# Altium PCB 把手锁主板20429.PcbDoc (part 1 of 2)
Units mil, origin at the board's own origin, x right, y up, seen from the top; angles counter-clockwise.
Board outline 5950 x 1025 mil, 2 copper layers (Top Layer, Bottom Layer); 74 components, 56 nets, 241 pads, 365 vias.
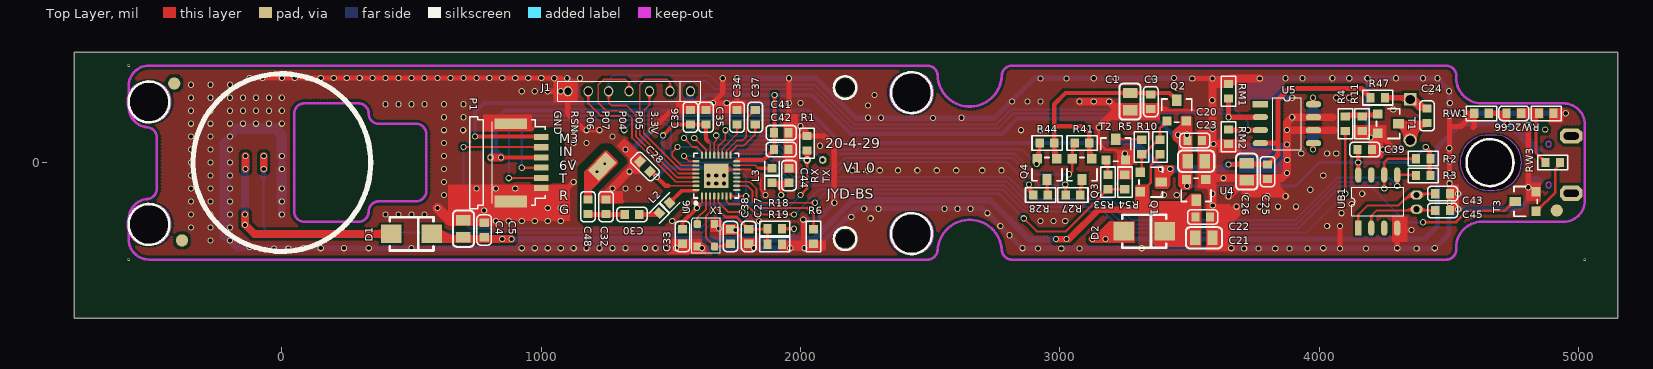
[diagram p0: Top Layer view]
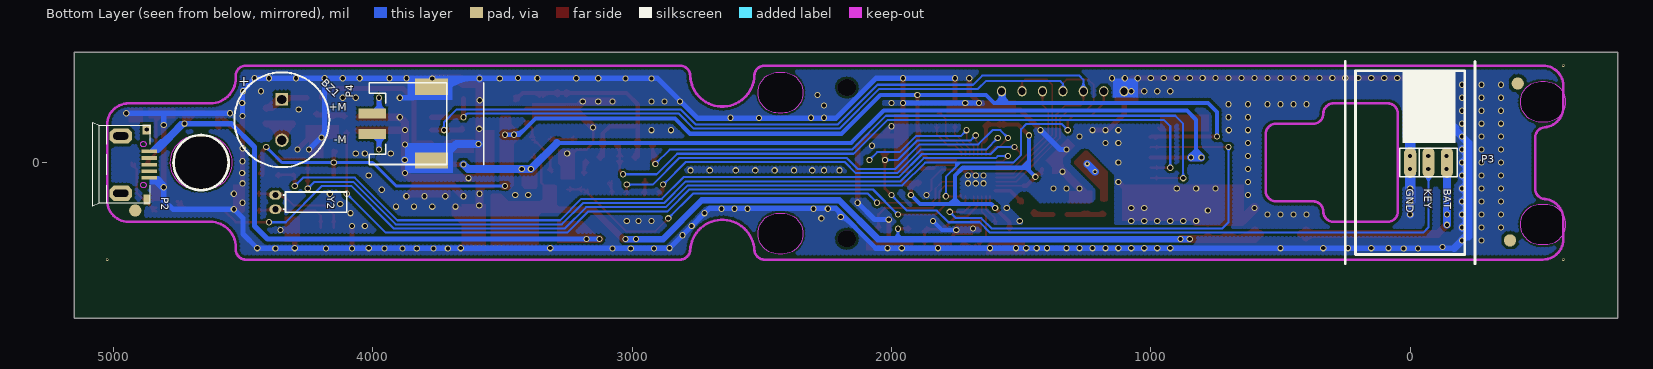
[diagram p1: Bottom Layer view, seen from below]
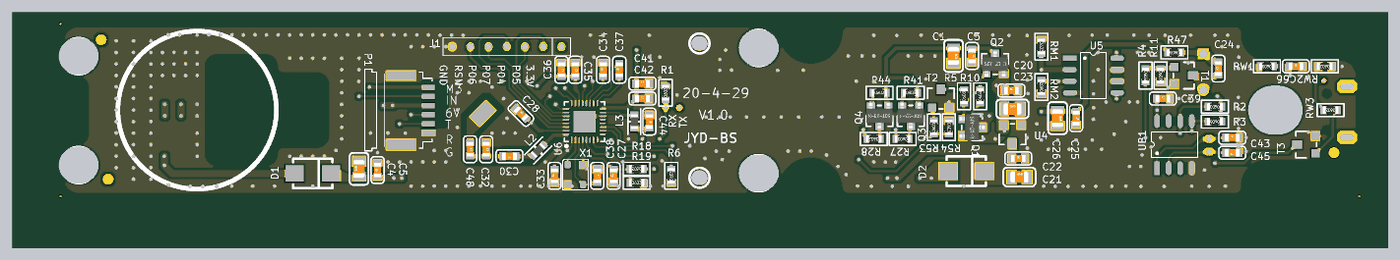
[diagram p3: 3D render of the assembled board from above, using the file's embedded part models]

## Layer stack, top to bottom
Top Layer: signal copper 1.4
Dielectric: dielectric 12.6, FR-4, Dk 4.8
Bottom Layer: signal copper 1.4

## Board outline
-800,425 5150,425 5150,-600 -800,-600
cut-out: 4673.23,106.3 4649.61,106.3 ccw(c4649.61,0) 4543.31,0 ccw(c4649.61,0) 4649.61,-106.3 4673.23,-106.3 ccw(c4673.23,0) 4779.53,0 ccw(c4673.23,0)
cut-out: -504.29,312.72 -520.04,312.72 ccw(c-520.04,233.98) -598.78,233.98 ccw(c-520.04,233.98) -520.04,155.24 -504.29,155.24 ccw(c-504.29,233.98) -425.55,233.98 ccw(c-504.29,233.98)
cut-out: -504.29,-159.72 -520.04,-159.72 ccw(c-520.04,-238.46) -598.78,-238.46 ccw(c-520.04,-238.46) -520.04,-317.2 -504.29,-317.2 ccw(c-504.29,-238.46) -425.55,-238.46 ccw(c-504.29,-238.46)
cut-out: 2435.43,-195.16 2419.69,-195.16 ccw(c2419.69,-273.9) 2340.94,-273.9 ccw(c2419.69,-273.9) 2419.69,-352.64 2435.43,-352.64 ccw(c2435.43,-273.9) 2514.17,-273.9 ccw(c2435.43,-273.9)
cut-out: 2435.43,348.15 2419.69,348.15 ccw(c2419.69,269.41) 2340.94,269.41 ccw(c2419.69,269.41) 2419.69,190.67 2435.43,190.67 ccw(c2435.43,269.41) 2514.17,269.41 ccw(c2435.43,269.41)

## Design rules (kind name [scope] priority, off if disabled: settings)
Clearance Clearance_2 [(IsWire)or(IsThruPin)or(IsFill)or(InPolygon)or(IsKeepOut) vs (IsWire)or(IsThruPin)or(IsFill)or(InPolygon)or(IsKeepOut)] p1 off: gap=10
Clearance Clearance_1 [InComponent('P2')] p2: gap=5
Clearance [All] p3: gap=7.87
ComponentClearance [All] p1: gap=0 collisioncheckmode=3 verticalgap=0 showdistances=FALSE
HoleSize [All] p1: absolutevalues=TRUE maxlimit=500 minlimit=1 maxpercent=80.000 minpercent=20.000
HoleToHoleClearance [All] p1: gap=0 allowstackedmicrovias=TRUE
MinimumSolderMaskSliver [All] p1: minsoldermaskwidth=0
PolygonConnect PolygonConnect_1 [IsVia] p1: connectstyle=Direct reliefconductorwidth=10 reliefentries=4 polygonreliefangle="90 Angle" airgapwidth=10
PolygonConnect [All] p2: connectstyle=Relief reliefconductorwidth=10 reliefentries=4 polygonreliefangle="90 Angle" airgapwidth=10
RoutingVias [All] p1: holewidth=280 width=500 viastyle="Through Hole" minholewidth=8 minwidth=10 maxholewidth=28 maxwidth=50
SilkToSilkClearance [All] p1: silktosilkclearance=0
SilkToSolderMaskClearance [IsPad] p1: minsilkscreentomaskgap=0 clearancetoexposedcopper=TRUE
SolderMaskExpansion [All] p1: expansion=4
Width [All] p1: maxlimit=80 minlimit=6 preferedwidth=7.87
22 further rules are at their usual default settings.

## Components (designator, comment, footprint, x,y, rotation, side; value= is the part's Value field where it differs from the comment)
BZ1 "BUZZER" BUZZER_D93_L40 4350,165 r270 bottom
C1 "22uF" 0805C 3270,235 r270 top
C3 "0.1uF" 0603C 3350,235 r270 top
C4 "4.7UF/24V" 0805C 700,-255 r90 top
C5 "0.1uF" 0603C 780,-260 r90 top
C20 "0.1uF" 0603C 3520,85 r0 top
C21 "22uF/10V" 0805C 3555,-290 r0 top
C22 "0.1uF" 0603C 3550,-210 r0 top
C23 "10uF/10V" 0805C 3525,5 r0 top
C24 "10uF/10V" 0603C 4415,180 r90 top
C25 "0.1uF" 0603C 3800,-35 r270 top
C26 "22uF" 0805C 3720,-35 r270 top
C27 "1nF" 0603C 1800,-285 r90 top
C28 "1uF/6.3V" 0603C 1400,-15 r315 top
C30 "1.5pF" 0603C 1350,-200 r180 top
C32 "1pF" 0603C 1250,-170 r270 top
C33 "0.1uF" 0603C 1545,-285 r90 top
C34 "0.1uF" 0603C 1755,175 r90 top
C35 "1uF" 0603C 1635,175 r270 top
C36 "0.1uF" 0603C 1575,175 r270 top
C37 "0.1uF" 0603C 1825,175 r90 top
C38 "2.7pF" 0603C 1730,-285 r270 top
C39 "0.1uF" 0603C 4175,50 r0 top
C41 "10uF/6.3V" 0603C 1925,115 r0 top
C42 "0.1uF" 0603C 1925,50 r0 top
C43 "22pF" 0603C 4475,-120 r0 top
C44 "10uF/6.3V" 0603C 1955,-50 r270 top
C45 "22pF" 0603C 4475,-185 r180 top
C48 "NC_R0" 0603C 1180,-170 r270 top
C66 "10uF/10V" 0603C 4750,190 r0 top
D1 "SS14" DO-214AA 500,-275 r180 top
D2 "SS14" DO-214AA 3325,-265 r180 top
J1 "7P" 7P-2.0MM_1 1575,275 r180 top
L2 "2nH" 0603L 1475,-175 r45 top
L3 "4.7uH" 0603L 1890,-50 r90 top
P1 "指纹串口" SH-1.0-6P 1000,0 r270 top
P2 "MICROUSB" MICRO-USB_F-B 4915.75,-7.87 r270 bottom
P3 "电池盒" 3P-1.8MM 0,0 r180 bottom
P4 "电机接口" S2B-PH-SM3-TB 3950,150 r90 bottom
Q1 "SI2301" "SOT-23 - GDS" 3350,-75 r270 top
Q2 "SI2301" "SOT-23 - GDS" 3450,200 r0 top
Q3 "BSS123W" "SOT-23 - GDS" 3085,-25 r180 top
Q4 "BSS123W" "SOT-23 - GDS" 2950,-25 r180 top
R1 "NC/100K" 0603R 2025,75 r90 top
R2 "10K" 0603R 4400,15 r180 top
R3 "10K" 0603R 4400,-50 r180 top
R4 "200R" 0603R 4100,150 r270 top
R5 "1K" 0603R 3315,60 r90 top (schematic designator R53)
R6 "10K" 0603R 2050,-285 r90 top
R10 "100K" 0603R 3385,60 r90 top
R11 "10K" 0603R 4165,150 r270 top
R18 "2M%1" 0603R 1900,-255 r180 top
R19 "500K%1" 0603R 1900,-315 r0 top
R27 "10R" 0603R 3050,-125 r180 top
R28 "10R" 0603R 2925,-125 r180 top
R41 "10K" 0603R 3085,75 r0 top
R44 "10K" 0603R 2950,75 r0 top
R47 "10R" 0603R 4225,250 r180 top
R53 "4.7K" 0603R 3185,-75 r90 top
R54 "100K" 0603R 3250,-75 r270 top
RM1 "10K" 0603R 3650,275 r270 top
RM2 "10K" 0603R 3650,100 r90 top
RW1 "100K" 0603R 4625,190 r180 top
RW2 "100K" 0603R 4875,190 r180 top
RW3 "200R" 0603R 4900,0 r180 top
T1 "SS8050" SOT-23-3L 4265,150 r270 top
T2 "PMBT3904" SOT-23-3L 3215,50 r0 top
T3 "PMBT3904" SOT-23-3L 4795,-150 r90 top
U4 "HT7533" SOT-23-3L 3525,-105 r180 top
U5 "CP2117" SOP8 3875,150 r0 top
U6 "BK3431Q" QFN32_4*4*0.4 1675,-50 r90 top
UB1 "PCF8563" SOP8 4225,-150 r90 top
X1 "16MHZ" XTAL3225 1635,-280 r270 top
Y2 "32.768KHZ" 晶振-9 4375,-125 r270 bottom

## Footprints (in the part's own frame and the unit in brackets; to place one, negate y for a bottom-side part, rotate by r counter-clockwise, add the part's x,y. Pads: shape width x height; smd on the part's side, far side on the other; paste and mask are expansions set on the pad)
3P-1.8MM [mm]
  oval 1.2x3 smd: 1(0,0) 2(1.8,0) 3(3.6,0)
  silkscreen extent -1,-1.4 4.6,1.4
7P-2.0MM_1 [mm]
  oval 0.9x1 hole 0.7 mask+0.05: 1(0,0) 2(2,0) 3(4,0) 4(6,0) 5(8,0) 6(10,0) 7(12,0)
  silkscreen extent -1,-1 13,1
0603C [mm]
  rect 0.8x0.9 smd: 1(-0.711,0) 2(0.711,0)
  silkscreen extent -1.47,-0.71 1.47,0.71, body extent -0.8,-0.4 0.8,0.4, height 0.3
0603L [mm]
  rect 0.8x0.9 smd: 1(-0.711,0) 2(0.711,0)
  silkscreen extent -1.4,-0.7 1.4,0.7, body extent -1.21,-1.21 1.21,1.21, height 0.46
0603R [mm]
  rect 0.8x0.9 smd: 1(-0.711,0) 2(0.711,0)
  silkscreen extent -1.47,-0.71 1.47,0.71, body extent -0.85,-0.4 0.85,0.4, height 0.56
0805C [mil]
  rect 40x56 smd: 1(-33,0) 2(33,0)
  silkscreen extent -70,-41 70,41, body extent -39,-25 39,25, height 30
BUZZER_D93_L40 [mm]
  rect 1.2x1.2 hole 0.9: 1(-2,0)
  round 1.3 hole 0.9: 2(2,0)
  silkscreen extent -4.65,-4.65 4.65,4.65
DO-214AA [mm]
  rect 2x1.8 smd: 1(2,0) 2(-2,0)
  silkscreen extent -2.15,-1.63 2.15,1.63
MICRO-USB_F-B [mm]
  rect 0.36x1.5 smd mask+0.05: 1(-1.3,1.4) 2(-0.65,1.4) 3(0,1.4) 4(0.65,1.4) 5(1.3,1.4)
  oct 1.5x2.2 hole 0.7 slot 1.5 at 90 deg mask+0.05: 6(2.8,-1.4) 7(-2.8,-1.4)
  rect 1x0.6 smd: 8(3.429,1.143)
  rect 1x0.8 / inner rect 1x0.8 / far side round 0.6 hole 0.4 unplated: 9(-3.429,1.143)
  Keep-Out Layer circle w0.1: c-2,0.813 r0.275
  Keep-Out Layer circle w0.1: c2,0.813 r0.275
  silkscreen extent -4.1,-4.14 4.1,1.5
QFN32_4*4*0.4 [mm]
  rect 2.4x2.4 smd paste-0.025 mask+0.051: 0(0,0)
  oval 0.7x0.2 smd paste-0.025 mask+0.051: 1(-2,1.4) 2(-2,1) 3(-2,0.6) 4(-2,0.2) 5(-2,-0.2) 6(-2,-0.6) 7(-2,-1) 8(-2,-1.4) 17(2,-1.4) 18(2,-1) 19(2,-0.6) 20(2,-0.2) 21(2,0.2) 22(2,0.6) 23(2,1) 24(2,1.4)
  oval 0.2x0.7 smd paste-0.025 mask+0.051: 9(-1.4,-2) 10(-1,-2) 11(-0.6,-2) 12(-0.2,-2) 13(0.2,-2) 14(0.6,-2) 15(1,-2) 16(1.4,-2) 25(1.4,2) 26(1,2) 27(0.6,2) 28(0.2,2) 29(-0.2,2) 30(-0.6,2) 31(-1,2) 32(-1.4,2)
  silkscreen extent -2.82,-2.2 2.2,2.2
S2B-PH-SM3-TB [mm]
  rect 1x2.7 smd mask+0.05: 1(-1,1.3) 2(1,1.3)
  rect 1.6x3.2 smd mask+0.05: A(-3.6,-4.5) B(3.6,-4.5)
  silkscreen extent -4,-9.6 4,1.6
SH-1.0-6P [mm]
  rect 0.6x1.4 smd paste+0: 1(-2.5,0) 2(-1.5,0) 3(-0.5,0) 4(0.5,0) 5(1.5,0) 6(2.5,0)
  rect 1x3.2 smd paste+0: A(-3.8,-3)
  rect 1.2x3.2 smd: B(3.8,-3)
  silkscreen extent -4.5,-7 4.5,0.4
SOP8 [mm]
  rect 1.5x0.6 smd mask+0.05: 1(-2.6,1.905)
  oval 1.5x0.6 smd mask+0.05: 2(-2.6,0.635) 3(-2.6,-0.635) 4(-2.6,-1.905) 5(2.6,-1.905) 6(2.6,-0.635) 7(2.6,0.635) 8(2.6,1.905)
  round 0.4 on Top Overlay mask+0.05: ""(-0.949,1.905)
  silkscreen extent -1.4,-2.54 1.4,2.54
"SOT-23 - GDS" [mil]
  rect 36x43.31 smd: D(0,40)
  rect 36x36 smd: G(-37.4,-40) S(37.4,-40)
  silkscreen extent -57,-45 58,45, body extent -57,-55 57,55, height 47
SOT-23-3L [mil]
  rect 36x36 smd: 1(-37.4,-40) 2(37.4,-40)
  rect 36x43.31 smd: 3(0,40)
  silkscreen extent -57,-45 58,45
XTAL3225 [mm]
  rrect50% 0.8x0.7 smd: 1(-1.1,-0.85) 3(1.1,0.85)
  rect 0.8x0.7 smd: 2(1.1,-0.85) 4(-1.1,0.85)
  silkscreen extent -1.7,-1.4 1.7,1.4
晶振-9 [mm]
  oval 0.9x1.2 hole 0.6: 1(0,0) 2(1.4,0)
  rect 0x0 smd: 3(0.635,8)
  silkscreen extent -0.3,0.76 1.7,7

## Part data
BZ1: "Buzzer"
C1 C3 C4 C5: library part "CAP NP"
C20 C22 C25 C26 C27 C66: library part CAP-NP, "Capacitor, Ceramic"
C21 C23: library part CAP-P, "Capacitor, tolerance ±20%"
C24: library part C_0_Dup1
C28 C30 C32 C33 C34 C35 C36 C37 C38 C41 C42 C44 C48: library part Cap, "Capacitor"
C39 C43 C45: library part C
D1 D2: library part D
L2 L3: "Power Inductor, 4.7uH, 0.7A, 260mR DCR"
P1: library part "Header 6", "Header, 6-Pin"
P2 P4: library part MHDR1X2, "Header, 2-Pin"
P3: library part "Header 3", "Header, 3-Pin"
Q1 Q2: library part PWRMOSFET_EP_DGS_0
Q3 Q4: library part BSS123L_0
R1 RM1 RM2: library part Pro71C3.TMP_UnNamed_1
R2 R3 R41 R44: library part RES
R4 R11 R27 R28 R47: library part R_Dup1
R5 R10 R53 R54 RW1 RW2 RW3: library part R
R6 R18 R19: library part Res2, "Resistor"
T1 T2 T3: library part NPN_BJT, "Bipolar Junction Transistor"
U4: library part XC6206P302M
U5: library part AM24LC02_0
UB1: library part IC8
Y2: library part 晶振

## Free pads (board coordinates)
  round 30 / inner round 30 / far side round 24 hole 16: 0(2085,10) 2(2025,10)
  round 10 hole 5: 1(-590.55,-374.02) 2(-590.55,374.02) 3(5023.62,-374.02)
  round 39.37 hole 90.55 slot 106.3 at 0 deg: 1(-512.17,-238.46) 2(-512.17,233.98) 5(2427.56,-273.9) 6(2427.56,269.41)
  rect 59.06x98.43 smd rot 135: 1(1235,-15)
  round 23.62 hole 62.99 slot 70.87 at 0 deg: 3(2171.65,-293.58) 4(2171.65,289.09)
  round 39.37 hole 110.24 slot 118.11 at 0 deg: 7(4661.42,0)
  round 47.24 all layers, no hole: MARK(-415,305) MARK(-385,-300) MARK(4915,-185)

## Via types
v1: diameter 24, hole 16, Top Layer to Bottom Layer, tented both sides, 363 vias
v2: diameter 20, hole 10, Top Layer to Bottom Layer, tented both sides, 2 vias

## Nets (pads, with @x,y where several pads share a name; then routed paths per layer and width w, separated by ;. In a path a pad name is that pad's centre, name@x,y a point inside that pad or via, vN(x,y) a via of type N, cw(c..) or ccw(c..) an arc to the next point about the centre after c; other vN are vias at no path point)
ANT: C48.1 pad.1@1235,-15 | length 240.2
  Top Layer w20: C48.1@1180,-142 1180,-70 v2(1215,-35) pad.1@1216.59,-33.41 ; pad.1@1201.55,-28.92 cw(c1154.41,-28.92) 1187.74,-62.26 cw(c1221.08,-95.59) pad.1@1221.08,-48.45
  Bottom Layer w30: v2(1215,-35) v2(1245,-5)
BAT_ADC: C27.2 R18.2 R19.1 U6.4 | length 735.7
  Top Layer w6: R19.1@1862.99,-304.02 ccw(c1846.05,-287.08) 1870,-287.08 ; R18.2@1862.99,-265.98 cw(c1846.05,-282.92) 1870,-282.92 ; 1870,-292.57 cw(c1907.6,-292.57) R18.2@1881.01,-265.98 ; 1870,-291.91 ccw(c1893.12,-291.91) R19.1@1876.77,-308.26 ; 1870,-278.09 cw(c1893.12,-278.09) R18.2@1876.77,-261.74 ; 1870,-277.43 ccw(c1907.6,-277.43) R19.1@1881.01,-304.02 ; R19.1@1872,-315 1870,-313 1870,-257 R18.2@1872,-255
  Top Layer w7: U6.4@1667.13,-128.74 1667.13,-167 1675.13,-175
  Top Layer w10: 1675.13,-175 1710.13,-210 1753,-210 C27.2@1800,-257 1870,-257 1872,-259 R19.1@1872,-315 ; 1778.29,-235.29 cw(c1756.58,-257) C27.2@1787.28,-257 ; 1783.04,-240.04 ccw(c1798.03,-225.06) C27.2@1798.03,-246.25 ; C27.2@1809.57,-264.6 cw(c1827.92,-282.95) 1827.92,-257 cw(c1827.92,-231.05) C27.2@1809.57,-249.4 ; 1845.98,-257 ccw(c1845.98,-230.94) R18.2@1864.4,-249.37 ; 1846.13,-257 cw(c1846.13,-282.84) 1864.4,-264.57 cw(c1846.05,-282.92) 1872,-282.92 cw(c1897.95,-282.92) R18.2@1879.6,-264.57 ; R19.1@1864.4,-305.43 ccw(c1846.05,-287.08) 1872,-287.08 ccw(c1897.95,-287.08) R19.1@1879.6,-305.43
BEEP: R4.2 U6.7 | length 2998.2
  Top Layer w7: U6.7@1714.37,-128.74 1714.37,-149.37 1725,-160
  Top Layer w8: 1725,-160 1790,-160 1830,-200 v1(1975,-200) ; v1@1969.34,-205.66 ccw(c1955.69,-219.31) 1955.69,-200 ccw(c1955.69,-180.69) v1@1969.34,-194.34
  Top Layer w10: R4.2@4092.4,114.4 cw(c4074.05,96.05) 4100,96.05 cw(c4125.95,96.05) R4.2@4107.6,114.4 ; v1@4095.05,-115.05 ccw(c4083.1,-103.1) 4100,-103.1 ccw(c4116.9,-103.1) v1@4104.95,-115.05 ; v1(4100,-120) R4.2@4100,122
  Bottom Layer w8: v1(1975,-200) 2071,-104 2779,-104 2862.87,-187.87 3167.87,-187.87 3250,-270 3950,-270 v1(4100,-120) ; v1@1975,-192 ccw(c1975,-172.69) 1988.66,-186.34 ccw(c2002.31,-200) v1@1983,-200 ; v1@4092,-120 cw(c4072.69,-120) 4086.34,-133.66 cw(c4100,-147.31) v1@4100,-128
GND: C1.2 C3.2 C4.2 C5.2 C20.2 C21.2 C22.2 C23.2 C25.2 C26.2 C27.1 C28.1 C32.1 C33.1 C34.2 C35.1 C36.1 C38.1 C39.2 C41.2 C42.2 C43.2 C44.1 C45.1 J1.7 P1.6 P1.A P1.B P2.5 P3.1 P4.A P4.B R1.2 R6.1 R11.2 R19.2 R54.1 RM1.1 RM2.1 RW1.2 RW2.1 T1.2 T2.2 T3.2 U4.1 U5.6 U5.7 U6.0 U6.14 UB1.4 X1.2 X1.4 | length 26100.6
  Top Layer w7: v1(1675,-50) 1698.62,-26.38 U6.14@1753.74,-26.38 1806.38,-26.38 1845,-65 1845,-105 v1(1865,-125) ; U6.0@1675,-41.5 ccw(c1675,-20.98) 1689.51,-35.49 ccw(c1704.02,-50) U6.0@1683.5,-50 ; v1@1856.5,-125 ccw(c1835.98,-125) 1850.49,-110.49 ccw(c1865,-95.98) v1@1865,-116.5
  Top Layer w10: C38.1@1731.97,-267.75 cw(c1731.97,-305.84) 1758.91,-278.91 ; C38.1@1737,-257 C27.1@1793,-313 ; C38.1@1742.72,-257 ccw(c1756.52,-257) C38.1@1746.76,-266.76 ; C38.1@1747,-260 ccw(c1763.9,-260) 1751.95,-271.95 ; v1@1757,-260 ccw(c1798.04,-260) 1769.02,-289.02 ; 1771.09,-291.09 ccw(c1798.03,-264.16) C27.1@1798.03,-302.25 ; C27.1@1783.24,-303.24 cw(c1773.48,-313) C27.1@1787.28,-313 ; v1@3145.05,130.05 cw(c3133.1,118.1) 3150,118.1 cw(c3166.9,118.1) v1@3154.95,130.05 ; v1(3150,135) 3150,75 3175,50 3212.4,50 3250,12.4 T2.2@3252.4,10 ; T2.2@3239.4,10 ccw(c3208.02,10) 3230.21,32.19 ccw(c3252.4,54.38) T2.2@3252.4,23 ; v1@3245.05,30.05 cw(c3233.1,18.1) 3250,18.1 cw(c3266.9,18.1) v1@3254.95,30.05 ; C3.2@3350,202 C3.2@3350,207 ; 3402.33,202 3588,202
  Top Layer w12: v1@2810,235 v1(2815,235)
  Top Layer w16: v1@2010,-330 v1(2010,-220) ; 2010,-308.27 ccw(c2036.73,-308.27) v1@2017.83,-327.17
  Top Layer w20: v1(-125,326.18) 1073.82,326.18 1102.56,297.44 J1.7@1102.56,275 ; v1(750,-100) v1(825,-100) v1(900,-100) 1100,-100 v1(1125,-75) ; v1(1025,275) v1(1075,275) J1.7@1102.56,275 ; 1074.91,325.09 cw(c1026.79,276.97) J1.7@1094.84,276.97 ; J1.7@1097.1,267.58 cw(c1083.93,254.4) 1102.56,254.4 cw(c1121.19,254.4) J1.7@1108.02,267.58 ; J1.7@1097.1,282.42 ccw(c1083.93,295.6) 1102.56,295.6 ccw(c1121.19,295.6) J1.7@1108.02,282.42 ; 1154.51,135.49 ccw(c1175,155.97) v1@1175,127 ; v1@1229.6,125 1165,125 1102.56,187.44 J1.7@1102.56,275 ; C32.1@1250,-142 1250,-125.4 C28.1@1380.2,4.8 ; C32.1@1257.72,-142 cw(c1316.42,-142) v1@1274.91,-100.49 ; v1(1425,125) 1503,203 C36.1@1575,203 C35.1@1635,203 ; v1(1480,-330) v1(1520,-330) ; v1@1488.11,-330 ccw(c1488.11,-258.08) C33.1@1538.97,-308.94 ; v1@1522.92,-327.08 cw(c1543.03,-347.19) C33.1@1543.03,-318.75 ; C33.1@1537.28,-312.93 cw(c1520,-312.72) v1(1520,-330) ; 1572.28,-313 cw(c1572.28,-350.59) X1.2@1598.86,-324.01 ; X1.2@1597.12,-318.89 ccw(c1619.14,-296.86) v1@1619.95,-328 ; X1.2@1604.41,-322.82 ccw(c1620,-309.48) v1(1620,-330) 1608.23,-330 X1.2@1601.54,-323.31 1591.23,-313 C33.1@1545,-313 1537,-313 v1(1520,-330) ; C35.1@1642.72,203 cw(c1661.35,203) C35.1@1648.17,216.17 ; X1.4@1668.46,-236.69 1688.77,-257 C38.1@1730,-257 C38.1@1737,-257 ; X1.4@1671.14,-235.99 ccw(c1721.86,-185.26) C38.1@1721.86,-257 ; v1@1686.41,-252.59 ccw(c1697.07,-241.93) 1697.07,-257 ; v1(1700,325) 1700,268 C35.1@1635,203 ; v1(1755,325) C34.2@1755,203 C35.1@1635,203 ; C27.1@1793,-313 C27.1@1800,-313 1803,-313 v1(1820,-330) ; R19.2@1928,-315 1943,-330 v1(1960,-330) ; R19.2@1933.02,-314.17 ccw(c1960,-299.1) v1(1960,-330) ; R19.2@1936.5,-323.5 ccw(c1951.39,-308.61) v1@1959.25,-328.14 ; C42.2@1948.94,43.97 cw(c1934.29,29.33) 1955,29.33 ; C42.2@1948.94,56.03 ccw(c1934.29,70.67) 1955,70.67 ; C41.2@1948.94,108.97 cw(c1934.29,94.33) 1955,94.33 ; C41.2@1948.94,121.03 ccw(c1934.29,135.67) 1955,135.67 ; C41.2@1953,115 C41.2@1955,117 ; C41.2@1953,122.72 ccw(c1953,141.35) C41.2@1966.17,128.17 ; C44.1@1955,-22 C41.2@1955,103 ; v1(1955,325) v1(1955,230) C41.2@1955,117 ; C41.2@1957.06,117.1 ccw(c1991.1,151.13) 1991.1,103 ; C41.2@1959.03,121.03 cw(c2000,80.06) v1@2000,138 ; C41.2@1967,129 cw(c1991.29,104.72) v1@1999.52,138.06 ; v1@2003.34,136.66 cw(c1969.68,103) R1.2@2017.28,103 ; v1@2015,-328 ccw(c2015,-279.72) R6.1@2049.14,-313.86 ; R6.1@2036.83,-326.17 ccw(c2023.65,-313) R6.1@2042.28,-313 ; R6.1@2042.66,-310.95 cw(c2015,-300.39) v1(2015,-330) ; R6.1@2050,-313 2033,-330 v1(2015,-330) ; v1(2130,-155) 2130,65 2092,103 R1.2@2025,103 ; v1@2619,172 v1(2620,173) ; R54.1@3250,-47 3250,12.4 v1(3250,35) ccw(c3277.24,35) T2.2@3258.04,15.68 ; 3250,-15.11 cw(c3277.51,-15.11) T2.2@3258.06,4.34 ; C1.2@3270,202 3275,207 C3.2@3350,207 3407.33,207 ; C1.2@3285.07,194.93 cw(c3314.21,165.79) 3314.21,207 ; v1(3510,324) v1(3588,324) ; 3632.89,324 cw(c3632.89,289.38) RM1.1@3658.63,312.53 ; RM1.1@3636.83,316.17 cw(c3623.65,303) RM1.1@3642.28,303 ; RM1.1@3643.76,299.16 ccw(c3588,249.01) v1(3588,324) ; RM1.1@3650,303 3646.14,306.86 3629,324 v1(3588,324) ; C25.2@3801,-64 C25.2@3802,-65 ; v1(4080,-331) v1(4080,-245) ; R11.2@4165,122 R11.2@4174.4,112.6 ; R11.2@4171.35,125.72 ccw(c4199.7,149.78) 4199.7,112.6 ; R11.2@4172.72,122 ccw(c4191.35,122) R11.2@4178.17,108.83 ; 4181.64,105.36 ccw(c4197,120.73) 4197,99 ccw(c4197,133.77) T1.2@4221.59,109.18 ; v1@4195.06,96.51 ccw(c4174.4,91.29) R11.2@4174.4,112.6 ; v1@4195.59,95.59 cw(c4177.69,77.69) 4203,77.69 ; v1@4198.8,96.13 cw(c4225,83.53) T1.2@4225,112.6 ; 4199.7,73.81 ccw(c4224.84,73.81) C39.2@4207.06,56.03 ; v1@4199.7,98.31 cw(c4226.03,98.31) T1.2@4224.14,124.57 ; 4203,76.52 cw(c4231.7,76.52) T1.2@4226.46,104.73 ; 4203,81.49 cw(c4226.13,81.49) T1.2@4225.29,104.6 ; v1@4203,100.57 cw(c4227.23,100.57) T1.2@4222.81,124.4 ; T1.2@4217,112.6 cw(c4197.69,112.6) 4211.34,98.94 cw(c4225,85.28) 4225,104.6 cw(c4225,79.49) T1.2@4242.76,97.24 ; v1(4245,50) C39.2@4203,50 ; v1(4290,50) 4227.4,112.6 T1.2@4225,112.6 ; v1(4300,-330) UB1.4@4300,-252.36 4307.64,-260 v1(4355,-260) ; UB1.4@4301.28,-251.08 ccw(c4322.81,-229.55) 4322.81,-260 ; v1@4502,-166.74 ccw(c4519.29,-166.74) C45.1@4507.06,-178.97 ; 4502,-138.26 cw(c4519.29,-138.26) C43.2@4507.06,-126.03 ; 4502,-101.74 ccw(c4519.29,-101.74) C43.2@4507.06,-113.97 ; v1(4502,180) 4502,138.79 ; C43.2@4503,-120 v1(4535,-120) ; C45.1@4507.06,-187.1 cw(c4524.2,-204.23) v1@4524.2,-180 ; v1(4535,-180) 4508,-180 C45.1@4503,-185 4502,-184 v1(4502,-155) v1(4502,-80) v1(4502,5) 4502,138.79 ; v1(4550,190) RW1.2@4597,190 ; RW1.2@4583.83,176.83 cw(c4597,163.65) RW1.2@4597,182.28 ; 4593.16,135.57 4597,139.41 RW1.2@4597,190 ; v1(4805,145) v1(4805,-95) 4822.6,-112.6 T3.2@4835,-112.6 ; v1@4811.2,-101.2 ccw(c4824.53,-87.87) T3.2@4831.88,-105.23 ; RW2.1@4903,190 v1(4950,190) ; v1@1083.93,275 ccw(c1083.93,293.63) J1.7@1097.1,280.46 ; v1@1083.93,275 cw(c1083.93,256.37) J1.7@1097.1,269.54 ; v1@1083.93,275 ccw(c1083.93,293.63) J1.7@1097.1,280.46 ; v1@1083.93,275 cw(c1083.93,256.37) J1.7@1097.1,269.54 ; v1@1083.93,275 ccw(c1083.93,293.63) J1.7@1097.1,280.46 ; v1@1083.93,275 cw(c1083.93,256.37) J1.7@1097.1,269.54 ; C38.1@1737.93,-257 cw(c1737.93,-272.07) v1@1748.59,-261.41 ; C38.1@1737.93,-257 cw(c1737.93,-272.07) v1@1748.59,-261.41 ; C38.1@1737.93,-257 cw(c1737.93,-272.07) v1@1748.59,-261.41 ; C38.1@1737.93,-257 cw(c1737.93,-272.07) v1@1748.59,-261.41 ; C41.2@1955,103 C41.2@1955,117 ; C41.2@1955,103 R1.2@2025,103 ; C41.2@1955,117 1978,140 v1(2000,140) 2025,115 R1.2@2025,103 ; v1(1960,-330) 2010,-330 v1(2015,-330) ; R11.2@4174.4,112.6 v1@4199.7,87.3 ; R11.2@4174.4,112.6 4199.7,112.6 ; v1@4199.7,87.3 4199.7,112.6 ; v1@4199.7,87.3 4199.7,53.3 C39.2@4203,50 ; v1@4199.7,87.3 4203,84 ; 4199.7,112.6 T1.2@4225,112.6 ; C39.2@4203,50 4203,84 ; 4203,84 4203,90.6 T1.2@4225,112.6 ; 4205.69,112.6 ccw(c4205.69,131.91) T1.2@4219.34,118.25 ; 4205.69,112.6 cw(c4205.69,93.28) T1.2@4219.34,106.94 ; 4205.69,112.6 ccw(c4205.69,131.91) T1.2@4219.34,118.25 ; 4205.69,112.6 cw(c4205.69,93.28) T1.2@4219.34,106.94 ; 4205.69,112.6 ccw(c4205.69,131.91) T1.2@4219.34,118.25 ; 4205.69,112.6 cw(c4205.69,93.28) T1.2@4219.34,106.94 ; 4502,138.79 4545.79,138.79 RW1.2@4597,190 ; v1@4195.95,95.3 cw(c4188.19,82.68) 4203,82.68 ccw(c4188.19,82.68) v1@4195.95,95.3
  Top Layer w30: C5.2@780,-232 780,-225 v1(780,-185) ; v1(3075,235) v1(3130,235) v1(3190,235) 3218,207 C1.2@3275,207 ; v1(3150,135) 3217,202 C1.2@3270,202 C3.2@3350,202 ; 3237.86,207 cw(c3237.86,177.86) C1.2@3258.46,198.46 ; C20.2@3548,85 3588,85 ; C23.2@3555.05,-7.04 cw(c3507.73,-71.87) 3588,-71.87 ; C23.2@3555.6,17.39 ccw(c3525.78,72) v1@3588,72 ; C23.2@3558,5 3588,5 ; U4.1@3560.28,-62.88 ccw(c3493.36,4.04) 3588,4.04 ; U4.1@3560.49,-67.31 cw(c3512.36,-125.66) v1@3588,-125.66 ; U4.1@3562.4,-65 3588,-65 ; 3567.86,85 cw(c3567.86,47.86) v1@3594.12,74.12 ; C23.2@3569.98,-8.94 ccw(c3553.4,21.43) 3588,21.43 ; C23.2@3572.74,17.19 cw(c3550.82,-12.84) 3588,-12.84 ; C22.2@3577.47,-212.5 cw(c3552.05,-237.92) 3588,-237.92 ; C22.2@3577.47,-207.5 ccw(c3552.05,-182.08) 3588,-182.08 ; C22.2@3578,-210 C22.2@3588,-210 ; C21.2@3588,-303 cw(c3588,-334.38) 3610.19,-312.19 ; C21.2@3588,-277 ccw(c3588,-245.62) 3610.19,-267.81 ; 3593,-60 v1(3630,-60) 3855,-60 v1(3875,-40) v1(3875,70) v1(3875,126) ; v1(3650,-130) 3712,-68 C26.2@3720,-68 v1(3720,-130) ; RM1.1@3652.5,302.47 cw(c3704.47,250.5) 3704.47,324 ; RM1.1@3652.72,303 cw(c3677.9,303) 3660.09,320.81 ; v1@3660,-328.7 3626.7,-328.7 C21.2@3588,-290 ; 3680.62,-60 cw(c3680.62,-99.38) C26.2@3708.46,-71.54 ; 3712.04,72 RM2.1@3650,72 v1(3592,72) v1@3588,72 ; C26.2@3731.54,-71.54 cw(c3759.38,-99.38) 3759.38,-60 ; v1(3770,324) 3663.28,324 3642.28,303 3609,303 v1(3588,324) 3588,202 3588,85 ; v1(3800,-130) C25.2@3800,-63 3801,-64 3867,-130 v1(3870,-130) ; 4050.27,175 U5.7@3977.36,175 v1(3895,175) 3875,155 v1(3875,126) ; 4054.81,125 U5.6@3977.36,125 3876,125 v1(3875,126) ; C21.2@3588,-290 3680,-198 v1(3680,-170) 3640,-210 C22.2@3588,-210 ; C21.2@3588,-290 C22.2@3588,-210 ; C22.2@3588,-210 v1(3588,-120) 3588,-65 ; 3588,-65 3588,5 ; 3588,5 v1@3588,72 ; v1@3588,72 3588,85 ; U4.1@3564.52,-67.12 cw(c3581.72,-84.31) 3581.72,-60 ccw(c3581.72,-84.31) U4.1@3564.52,-67.12
  Top Layer w40: v1(600,-175) 650,-225 780,-225 v1(825,-225)
  Bottom Layer w16: v1(1750,-260) 1805,-260 v1(1840,-225)
  Bottom Layer w20: -170,-330 v1(84,-330) v1(150,-330) v1(240,-330) v1(335,-330) v1(500,-330) v1(925,-330) v1(975,-330) v1(1025,-330) v1(1075,-330) v1(1125,-330) v1(1175,-330) v1(1225,-330) v1(1275,-330) v1(1325,-330) v1(1400,-330) v1(1440,-330) v1(1480,-330) v1(1520,-330) v1(1620,-330) v1(1820,-330) v1(1960,-330) v1(2015,-330) 2060,-330 2214,-176 2701,-176 v1(2720,-195) v1(2770,-245) v1(2855,-330) v1(3315,-330) v1(3660,-330) v1(4015,-330) v1(4300,-330) v1(4445,-330) 4500,-275 4500,-215 v1(4535,-180) 4770,-180 4805,-145 v1(4805,-95) 4805,-85 4828,-62 P2.5@4845,-62 ; -141.9,-330 ccw(c-141.9,-308.1) v1@-126.41,-323.59 ; v1@-123.59,-323.59 ccw(c-108.1,-308.1) -108.1,-330 ; P3.1@0,0 v1(0,25) ; v1(1325,50) 1350,50 v1(1425,125) ; v1(1662,230) v1(1955,230) ; v1(1755,325) v1(1955,325) 2059.49,325 2213.74,170.75 2747.75,170.75 2902,325 v1(3130,325) v1(3215,325) v1(3365,325) v1(3869,325) ; v1(2010,-220) 2065,-220 v1(2130,-155) ; 2165.98,-224.02 cw(c2195,-253.04) v1@2195,-212 ; v1@2197,-210 cw(c2238.04,-210) 2209.02,-180.98 ; 3609.13,325 cw(c3609.13,159.52) P4.B@3726.14,276.53 ; 3657.41,325 cw(c3657.41,207.81) P4.B@3740.28,290.67 ; 3705.7,325 cw(c3705.7,256.09) P4.B@3754.42,304.82 ; P4.B@3726.9,304.66 cw(c3750.91,300.65) 3750.91,325 ; P4.B@3746.63,301.37 cw(c3774.53,296.71) v1@3774.53,325 ; 3753.98,325 cw(c3753.98,304.37) P4.B@3768.56,318.96 ; P4.B@3766.35,298.07 cw(c3798.15,292.76) 3798.15,325 ; P4.B@3772.83,291.73 3803.27,291.73 3845,250 v1(3895,250) ; P4.B@3786.08,294.78 cw(c3821.76,288.82) 3821.76,325 ; P4.B@3804.33,270.24 cw(c3804.33,220.91) 3839.21,255.79 ; P4.B@3805.81,291.49 cw(c3845.38,284.88) 3845.38,325 ; P4.B@3825.53,288.19 cw(c3869,280.93) v1(3869,325) ; P4.B@3825.83,291.73 ccw(c3880.29,291.73) 3841.78,253.22 ; 4185,130.8 ccw(c4230.8,130.8) v1@4198.41,98.41 ; v1(4245,50) 4185,110 v1(4185,325) ; 4493.05,286.95 cw(c4481.1,275) v1@4498,275 ; v1(4502,180) 4502,278 v1(4455,325) v1(4400,325) v1(4295,325) v1(4185,325) ; v1(4550,190) 4805,190 ; v1(4805,145) 4805,190 ; v1@4807,-95 cw(c4835.97,-95) 4815.49,-74.51 ; v1(4950,190) 4805,190 ; v1(3869,325) v1(3935,325) v1(4050,325) v1(4115,325) v1(4185,325)
  Bottom Layer w30: -225,-285.35 cw(c-182.59,-285.35) v1@-201.33,-247.31 ; -225,-253.11 cw(c-146.89,-253.11) v1@-202.12,-197.88 ; -225,-203.11 cw(c-146.89,-203.11) v1@-202.12,-147.88 ; -225,-196.89 ccw(c-146.89,-196.89) v1@-202.12,-252.12 ; -225,-153.11 cw(c-146.89,-153.11) v1@-202.12,-97.88 ; -225,-146.89 ccw(c-146.89,-146.89) v1@-202.12,-202.12 ; -225,-103.11 cw(c-146.89,-103.11) v1@-202.12,-47.88 ; -225,-96.89 ccw(c-146.89,-96.89) v1@-202.12,-152.12 ; -225,-53.11 cw(c-146.89,-53.11) v1@-202.12,2.12 ; -225,-46.89 ccw(c-146.89,-46.89) v1@-202.12,-102.12 ; -225,-3.11 cw(c-146.89,-3.11) v1@-202.12,52.12 ; -225,3.11 ccw(c-146.89,3.11) v1@-202.12,-52.12 ; -225,53.11 ccw(c-146.89,53.11) v1@-202.12,-2.12 ; -170,-330 -225,-275 -225,75 -170,130 ccw(c-170,153.26) v1@-147.04,149.52 ; v1@-152.12,147.88 ccw(c-108.96,191.04) -108.96,130 ; -141.04,130 ccw(c-141.04,191.04) v1@-97.88,147.88 ; v1@-102.12,147.88 ccw(c-58.96,191.04) -58.96,130 ; -91.04,130 ccw(c-91.04,191.04) v1@-47.88,147.88 ; v1@-52.79,148.9 ccw(c-25,159.88) -25,130 ; v1(0,-200) v1(0,-150) ; v1(0,-25) P3.1@0,0 ; v1(3588,324) v1@3588,324.22 ; v1(3592,72) 3676.67,72 3738.67,10 v1(3876,10) ; P4.A@3711.58,37.09 ccw(c3741.34,66.84) P4.A@3741.34,24.76 ; P4.A@3713.84,34.83 cw(c3687.27,8.27) P4.A@3724.84,8.27 ; P4.A@3816,-3.4 cw(c3848.34,-35.74) 3848.34,10 ; P4.A@3816,19.93 ccw(c3839.97,43.91) 3839.97,10
  Bottom Layer w40: -170,130 -25,130 0,105 v1(0,25) ; v1(0,-150) v1(0,-100) v1(0,-25)
  other v1: -30,-331 25,-331 2915,-331 3005,-331 3075,-331 3710,-331 3765,-331 3830,-331 3885,-331 3954,-331 4180,-331 4375,-331 -125,-325 -275,-300 -200,-300 2805,-280 1685,-254 -350,-250 -275,-250 -200,-250 4030,-245 875,-225 925,-225 975,-225 1025,-225 1075,-225 1505,-225 2925,-225 2975,-225 3020,-225 2270,-215 2195,-210 -350,-200 -275,-200 -200,-200 400,-200 450,-200 500,-200 550,-200 4085,-195 2245,-178 2300,-178 2555,-178 2605,-178 2655,-178 1025,-175 1075,-175 1555,-175 3770,-170 3840,-170 3910,-170 3589,-165 4125,-160 -350,-150 -275,-150 -200,-150 625,-125 3400,-125 3450,-125 4165,-120 3965,-105 -350,-100 -275,-100 -200,-100 1275,-100 1325,-100 1375,-100 1645,-80 1675,-80 1705,-80 625,-75 -350,-50 -275,-50 -200,-50 1645,-50 1705,-50 4015,-50 4503,-40 1340,-35 2200,-30 2260,-30 2305,-30 2375,-30 2450,-30 2525,-30 2600,-30 2700,-30 2775,-30 625,-25 -350,0 -275,0 -200,0 1125,0 625,25 3930,35 4030,35 4065,35 -350,50 -275,50 -200,50 4501,55 2075,65 625,75 1125,75 1175,75 4197,97 -350,100 -275,100 -200,100 1275,100 625,125 699.09,125 1125,125 1175,125 1225,125 2850,125 2925,125 3589,130 -350,150 -275,150 -200,150 -150,150 -100,150 -50,150 0,150 2510,172 2260,173 2310,173 625,175 700,175 -350,200 -275,200 -200,200 -150,200 -100,200 -50,200 0,200 4285,205 2260,220 400,225 450,225 500,225 550,225 625,225 700,225 1715,230 2000,230 4503,230 2875,235 2925,235 3587,240 -350,250 -275,250 -200,250 -150,250 -100,250 -50,250 0,250 4065,250 4115,250 2285,260 925,275 975,275 4430,275 4500,275 -350,300 -275,300 -200,300 2925,324 3025,324 1050,325 1100,325 1150,325 -75,326.18 0,326.18 50,326.18 100,326.18 150,326.18 200,326.18 250,326.18 300,326.18 350,326.18 400,326.18 450,326.18 500,326.18 550,326.18 600,326.18 650,326.18 700,326.18 750,326.18 800,326.18 850,326.18 900,326.18 950,326.18 1000,326.18 3440,326
INT_APT: U6.12
INT_FP: P1.2 U6.5 | length 1984
  Top Layer w6: U6.5@1682.87,-128.74 1682.87,-152.87 1690,-160
  Top Layer w8: v1(700,60) 999.06,60 P1.2@1000,59.06 ; v1@705.66,54.34 cw(c719.31,40.69) 719.31,60 cw(c719.31,79.31) v1@705.66,65.66 ; 963.11,60 cw(c963.11,37.92) P1.2@978.73,53.53 ; 967.68,60 ccw(c967.68,75.63) P1.2@978.73,64.58 ; 1690,-160 1720,-190 v1(1775,-190) ; v1@1769.34,-195.66 ccw(c1755.69,-209.31) 1755.69,-190 ccw(c1755.69,-170.69) v1@1769.34,-184.34
  Bottom Layer w8: v1@694.34,54.34 cw(c680.69,40.69) 700,40.69 cw(c719.31,40.69) v1@705.66,54.34 ; v1(700,60) 700,-229.13 725,-254.13 1613.42,-254.13 1653.42,-214.13 1750.87,-214.13 v1(1775,-190) ; v1@1767,-190 cw(c1747.69,-190) 1761.34,-203.66 cw(c1775,-217.31) v1@1775,-198
IRQ_TSM12: U6.6
M3V3: C20.1 C23.1 C39.1 C41.1 C42.1 J1.1 P1.1 Q2.S R2.1 R3.1 U4.2 U6.16 UB1.8 | length 5994.7
  Top Layer w12: R3.1@4425,-47 R3.1@4428,-50
  Top Layer w16: v1(745,100) 998.43,100 P1.1@1000,98.43 ; 971.25,100 cw(c971.25,85.42) P1.1@981.56,95.73 ; 1755,10 1857,10 C42.1@1897,50 1900,53 v1(1900,260) ; 1880.41,33.41 cw(c1897,16.83) C42.1@1897,40.28 ; C42.1@1891.52,57.45 ccw(c1871.05,77.92) 1900,77.92 ; C41.1@1891.52,107.55 cw(c1871.05,87.08) 1900,87.08 ; C41.1@1891.52,122.45 ccw(c1871.05,142.92) 1900,142.92 ; 3476.31,107 cw(c3476.31,82.41) C20.1@3499.92,89.27 ; C20.1@3484.56,84.81 ccw(c3455,76.22) v1(3455,107) v1(3490,107) ; C39.1@4141.52,42.55 cw(c4121.05,22.08) 4150,22.08 ; UB1.8@4150,-47.64 v1(4150,0) C39.1@4150,47 ; v1(4410,60) 4425,45 R3.1@4425,-47 ; 4425,-22.08 ccw(c4453.95,-22.08) R3.1@4433.48,-42.55 ; 4425,-12.92 cw(c4453.95,-12.92) R2.1@4433.48,7.55 ; 4425,42.92 ccw(c4453.95,42.92) R2.1@4433.48,22.45
  Top Layer w20: Q2.S@3481.75,154.34 cw(c3461.82,134.41) 3490,134.41 ; U4.2@3481.94,-70.66 cw(c3462.49,-90.11) v1@3490,-90.11 ; U4.2@3481.94,-59.34 ccw(c3462.49,-39.89) 3490,-39.89 ; Q2.S@3487.4,160 3490,157.4 v1(3490,107) v1(3490,-90) ; 3490,-31.97 cw(c3520.97,-31.97) C23.1@3499.07,-10.07 ; 3490,41.97 ccw(c3520.97,41.97) C23.1@3499.07,20.07 ; 3490,64.33 cw(c3510.71,64.33) C20.1@3496.06,78.97 ; v1@3490,105.67 ccw(c3510.71,105.67) C20.1@3496.06,91.03 ; v1@3490,105.67 ccw(c3510.71,105.67) C20.1@3496.06,91.03 ; v1@3490,105.67 ccw(c3510.71,105.67) C20.1@3496.06,91.03
  Bottom Layer w12: v1(3490,-90) 3910,-90 4000,0 v1(4150,0) 4350,0 v1(4410,60) ; v1@3494.24,-94.24 cw(c3504.49,-104.49) 3504.49,-90 cw(c3504.49,-75.51) v1@3494.24,-85.76 ; v1@4145.76,-4.24 ccw(c4135.51,-14.49) 4135.51,0 ccw(c4135.51,14.49) v1@4145.76,4.24 ; v1@4154.24,-4.24 cw(c4164.49,-14.49) 4164.49,0 cw(c4164.49,14.49) v1@4154.24,4.24 ; v1@4404,60 cw(c4389.51,60) 4399.76,49.76 cw(c4410,39.51) v1@4410,54
  Bottom Layer w16: v1(745,100) 745,195 780,230 1550,230 ; 1559.02,239.02 ccw(c1538.27,259.76) J1.1@1565.86,269.73 ; J1.1@1568.13,266.16 cw(c1551.54,249.57) 1575,249.57 cw(c1598.46,249.57) J1.1@1581.87,266.16 ; J1.1@1570.2,277.09 ccw(c1583.34,265.99) 1571.18,253.82 ; 1575,235 1575,250 ; J1.1@1575,275 1575,255 ; J1.1@1582.42,266.76 ccw(c1596.68,254.72) 1583.48,241.52 ; 3414.03,127.97 ccw(c3455,168.94) v1@3455,111 ; v1(3490,107) v1(3455,107) 3435,107 3372.75,169.25 2834.25,169.25 2776,111 2192,111 2043,260 v1(1900,260) 1635,260 1605,230 1595,230 ; 1550,230 1575,255 ; 1550,230 1595,230 ; J1.1@1568.22,266.07 cw(c1552.57,250) 1575,250 ; J1.1@1568.22,266.07 cw(c1552.57,250) 1575,250 ; J1.1@1568.22,266.07 cw(c1552.57,250) 1575,250 ; 1575,250 cw(c1597.43,250) J1.1@1581.78,266.07 ; 1575,250 cw(c1597.43,250) J1.1@1581.78,266.07 ; 1575,250 cw(c1597.43,250) J1.1@1581.78,266.07 ; 1575,250 1595,230 ; 1575,250 1575,255
MOTO+: P4.2 U5.8 | length 150.7
  Top Layer w20: v1(3975,250) 3975,227.36 U5.8@3977.36,225
  Bottom Layer w20: P4.2@3960.87,196.22 ccw(c3926.75,230.34) 3975,230.34 ; v1(3975,250) 3975,189.37 P4.2@4001.18,189.37
MOTO-: P4.1 U5.5 | length 150.7
  Top Layer w20: v1(3975,50) 3975,72.64 U5.5@3977.36,75
  Bottom Layer w20: P4.1@3960.87,103.78 cw(c3926.75,69.66) 3975,69.66 ; v1(3975,50) 3975,110.63 P4.1@4001.18,110.63
NetBZ1_1: BZ1.1 C24.2 R47.1 | length 471
  Top Layer w20: R47.1@4253,250 BZ1.1@4343.74,250 ; 4302,250 cw(c4302,195.74) BZ1.1@4340.37,234.11 ; BZ1.1@4350,250.12 cw(c4350,214.19) 4375.4,239.6 ; BZ1.1@4363.62,243.74 ccw(c4396.51,243.74) 4373.25,220.49 ccw(c4350,197.23) 4350,230.12 cw(c4350,145.91) C24.2@4409.55,205.45 ; 4392.92,222.08 ccw(c4413.03,242.19) C24.2@4413.03,213.75 ; C24.2@4415,208 C24.2@4407,208 ; BZ1.1@4343.74,250 4365,250 C24.2@4407,208 ; BZ1.1@4343.74,250 BZ1.1@4350,243.74 4385.74,208 C24.2@4407,208
NetBZ1_2: BZ1.2 C24.1 T1.3 | length 979.5
  Top Layer w20: T1.3@4308.65,142 cw(c4308.65,92.88) 4343.39,127.61 ; T1.3@4310.13,144.87 cw(c4251.53,86.26) BZ1.2@4334.41,86.26 ; T1.3@4314.31,144.34 cw(c4332.8,125.86) 4332.8,152 ; T1.3@4316.65,150 ccw(c4344.79,150) 4324.89,130.11 ; 4335.38,135.62 cw(c4289.23,89.47) BZ1.2@4354.4,86.03 ; BZ1.2@4338.98,97.28 ccw(c4312.36,123.9) 4350,123.9 ccw(c4387.64,123.9) BZ1.2@4361.02,97.28 ; BZ1.2@4345.76,85.06 cw(c4387.83,96.99) 4356.91,127.91 ; BZ1.2@4350,86.26 BZ1.2@4350,100 ; BZ1.2@4365,90.51 cw(c4425.37,107.63) 4381,152 ; BZ1.2@4365.59,86.26 cw(c4436.4,86.26) 4386.33,136.33 ; 4384.39,134.39 cw(c4413.03,105.74) C24.1@4413.03,146.25 ; C24.1@4415,152 C24.1@4402,152 ; T1.3@4305,150 BZ1.2@4350,105 ; T1.3@4305,150 4321,150 4350,121 ; T1.3@4305,150 4307,152 4350,152 ; BZ1.2@4350,100 BZ1.2@4350,105 ; BZ1.2@4350,100 C24.1@4402,152 ; BZ1.2@4350,105 4350,121 ; 4350,121 ccw(c4380.91,121) 4360.36,97.91 cw(c4380.91,121) 4350,121 ; 4350,121 cw(c4319.09,121) 4339.64,97.91 ccw(c4319.09,121) 4350,121 ; 4350,121 4350,152 ; 4350,121 4381,152 ; 4350,152 4381,152 ; 4381,152 C24.1@4402,152
NetC29_1: 
NetC29_2: C30.2 C32.2 C48.2 | length 191.6
  Top Layer w20: C48.2@1180,-198 1182,-200 C30.2@1322,-200 ; C48.2@1186.03,-193.94 ccw(c1200.67,-179.29) 1200.67,-200 ; 1229.33,-200 ccw(c1229.33,-179.29) C32.2@1243.97,-193.94 ; C32.2@1256.03,-193.94 ccw(c1270.67,-179.29) 1270.67,-200
NetC30_1: C30.1 L2.1 | length 107.9
  Top Layer w16: L2.1@1450,-200 L2.1@1455.2,-194.8
  Top Layer w20: C30.1@1378,-200 L2.1@1450,-200 ; 1424.02,-200 ccw(c1424.02,-163.61) L2.1@1449.74,-189.34
NetC34_1: C34.1 U6.19 | length 215.5
  Top Layer w6: U6.19@1698.62,28.74 1698.62,53.62 1755,110 C34.1@1755,147 ; C34.1@1745.99,137.99 cw(c1724.22,116.22) 1755,116.22 cw(c1785.78,116.22) C34.1@1764.01,137.99 ; C34.1@1750.23,142.23 cw(c1738.71,130.71) 1755,130.71 cw(c1771.29,130.71) C34.1@1759.77,142.23
NetC37_1: C37.1 U6.17 | length 223.3
  Top Layer w7: U6.17@1730.12,28.74 1730.12,40.5 1754.62,65 1780,65 1825,110 C37.1@1825,147 ; U6.17@1730.56,38.58 cw(c1736.23,38.58) 1732.22,42.6 ; C37.1@1816.34,138.34 cw(c1795.43,117.43) 1825,117.43 cw(c1854.57,117.43) C37.1@1833.66,138.34
NetC37_2: C37.2 U6.18 | length 297.1
  Top Layer w6: U6.18@1714.37,28.74 1714.37,45.08 1754.29,85 1775,85 1790,100 1790,168 C37.2@1825,203 ; 1799.88,177.88 ccw(c1774.75,203) C37.2@1810.28,203 ; 1804.63,182.63 cw(c1823.03,164.23) C37.2@1823.03,190.25 ; C37.2@1810.12,188.12 ccw(c1795.24,203) C37.2@1816.28,203
NetC38_2: C38.2 U6.3 X1.3 | length 461.3
  Top Layer w7: 1647.56,-302.4 ccw(c1668.46,-281.49) X1.3@1668.46,-311.06 ; U6.3@1651.38,-128.74 1651.38,-190 1635,-206.38 1635,-289.84 X1.3@1668.46,-323.31 ; 1652.31,-307.15 cw(c1638.12,-321.34) X1.3@1658.19,-321.34
  Top Layer w8: X1.3@1668.46,-323.31 1719.69,-323.31 C38.2@1730,-313 ; X1.3@1674.79,-323.31 ccw(c1674.79,-259.75) C38.2@1719.72,-304.69 ; X1.3@1675.38,-330.22 cw(c1692.07,-346.92) 1692.07,-323.31 cw(c1692.07,-299.7) X1.3@1675.38,-316.39 ; 1694.1,-323.31 ccw(c1694.1,-279.07) C38.2@1725.38,-310.35 ; C38.2@1713.41,-323.31 ccw(c1713.41,-298.38) C38.2@1731.04,-316.01
NetC43_1: C43.1 UB1.1 Y2.1 | length 656.4
  Top Layer w8: UB1.1@4144.48,-229.12 ccw(c4131.14,-215.79) 4150,-215.79 ccw(c4168.86,-215.79) UB1.1@4155.52,-229.12 ; UB1.1@4150,-252.36 4150,-201 4186,-165 4305,-165 4350,-120 C43.1@4447,-120 ; 4318.2,-151.8 cw(c4369.09,-202.69) Y2.1@4369.09,-130.72 ; 4331.86,-138.14 cw(c4369.09,-175.37) Y2.1@4369.09,-122.72 ; 4345.52,-124.48 cw(c4369.09,-148.06) Y2.1@4369.09,-114.72 ; Y2.1@4384.95,-129.04 cw(c4406.78,-150.87) 4406.78,-120 ; Y2.1@4390.6,-134.7 cw(c4426.09,-170.19) 4426.09,-120 ; Y2.1@4390.6,-115.3 ccw(c4401.95,-103.96) 4401.95,-120 ; C43.1@4438.69,-128.31 ccw(c4418.64,-148.36) 4418.64,-120 ccw(c4418.64,-91.64) C43.1@4438.69,-111.69